# Altium PCB PCB2 (1).PcbDoc
Units mm, origin at the board's own origin, x right, y up, seen from the top; angles counter-clockwise.
Board outline 65.48 x 44.09 mm, 2 copper layers (Top Layer, Bottom Layer); 33 components, 23 nets, 94 pads, 6 vias.
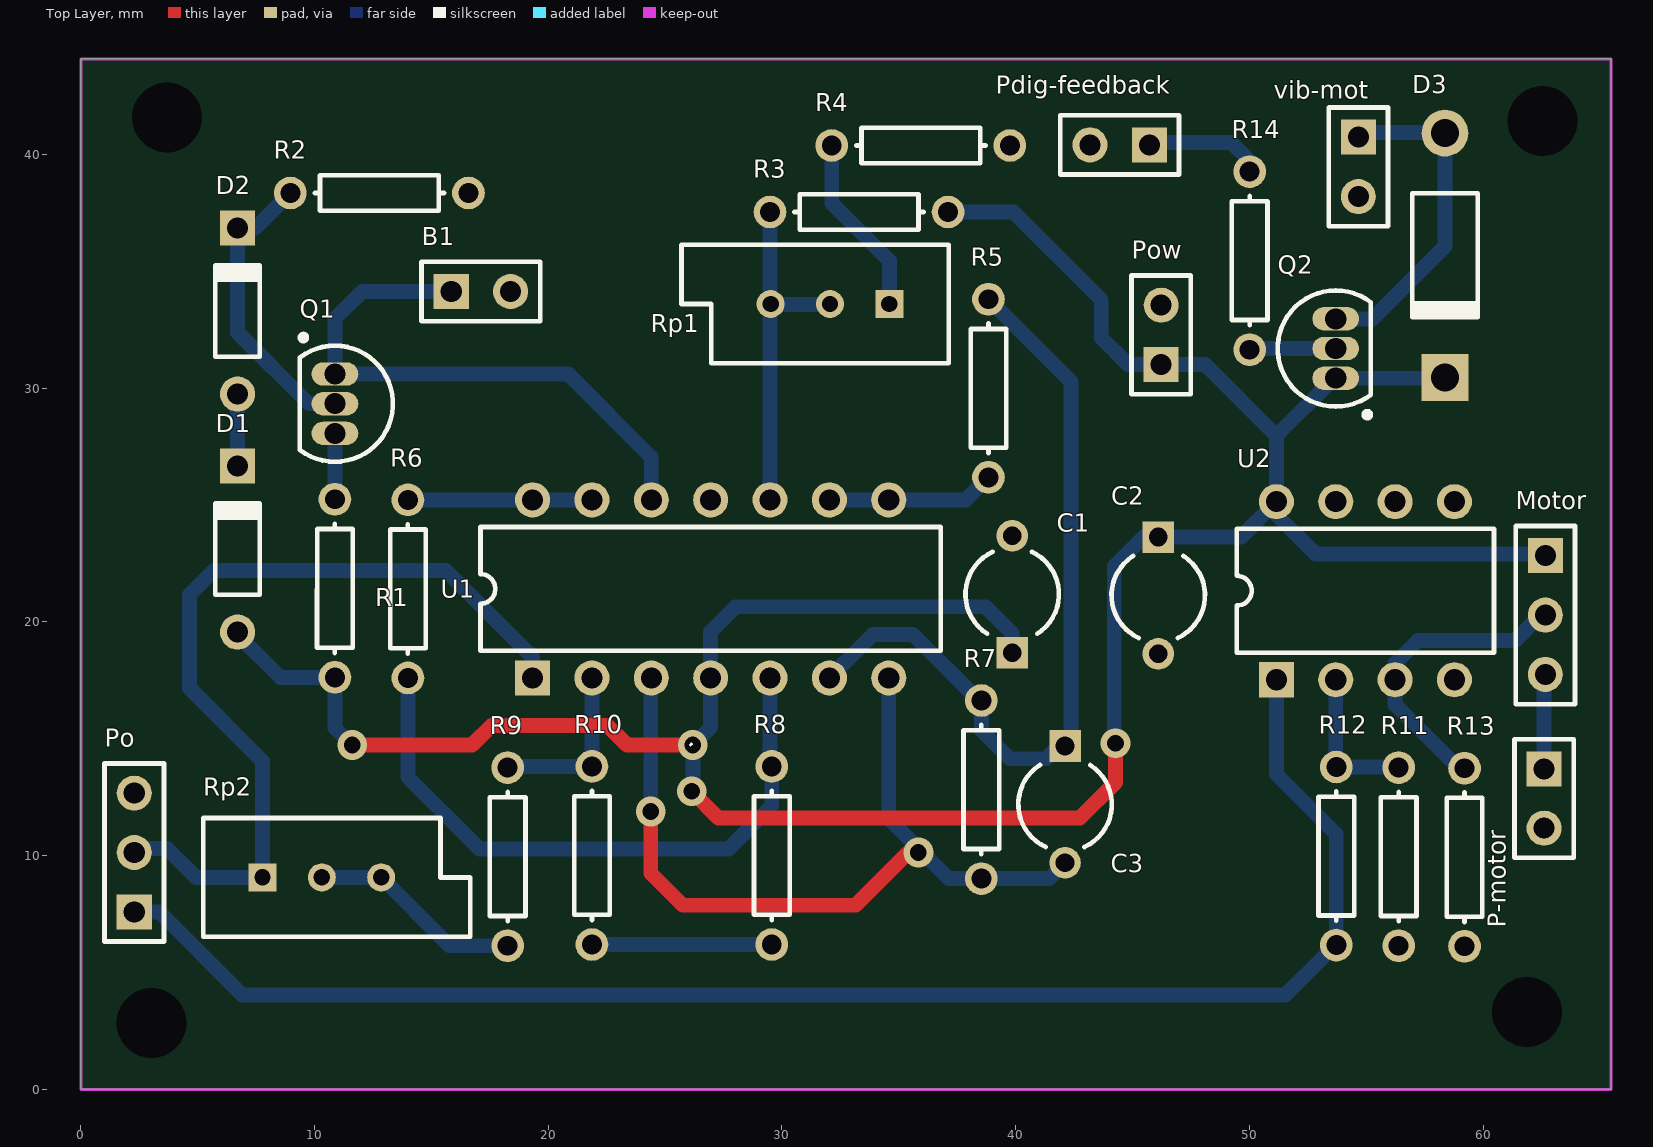
[diagram p0: Top Layer view]
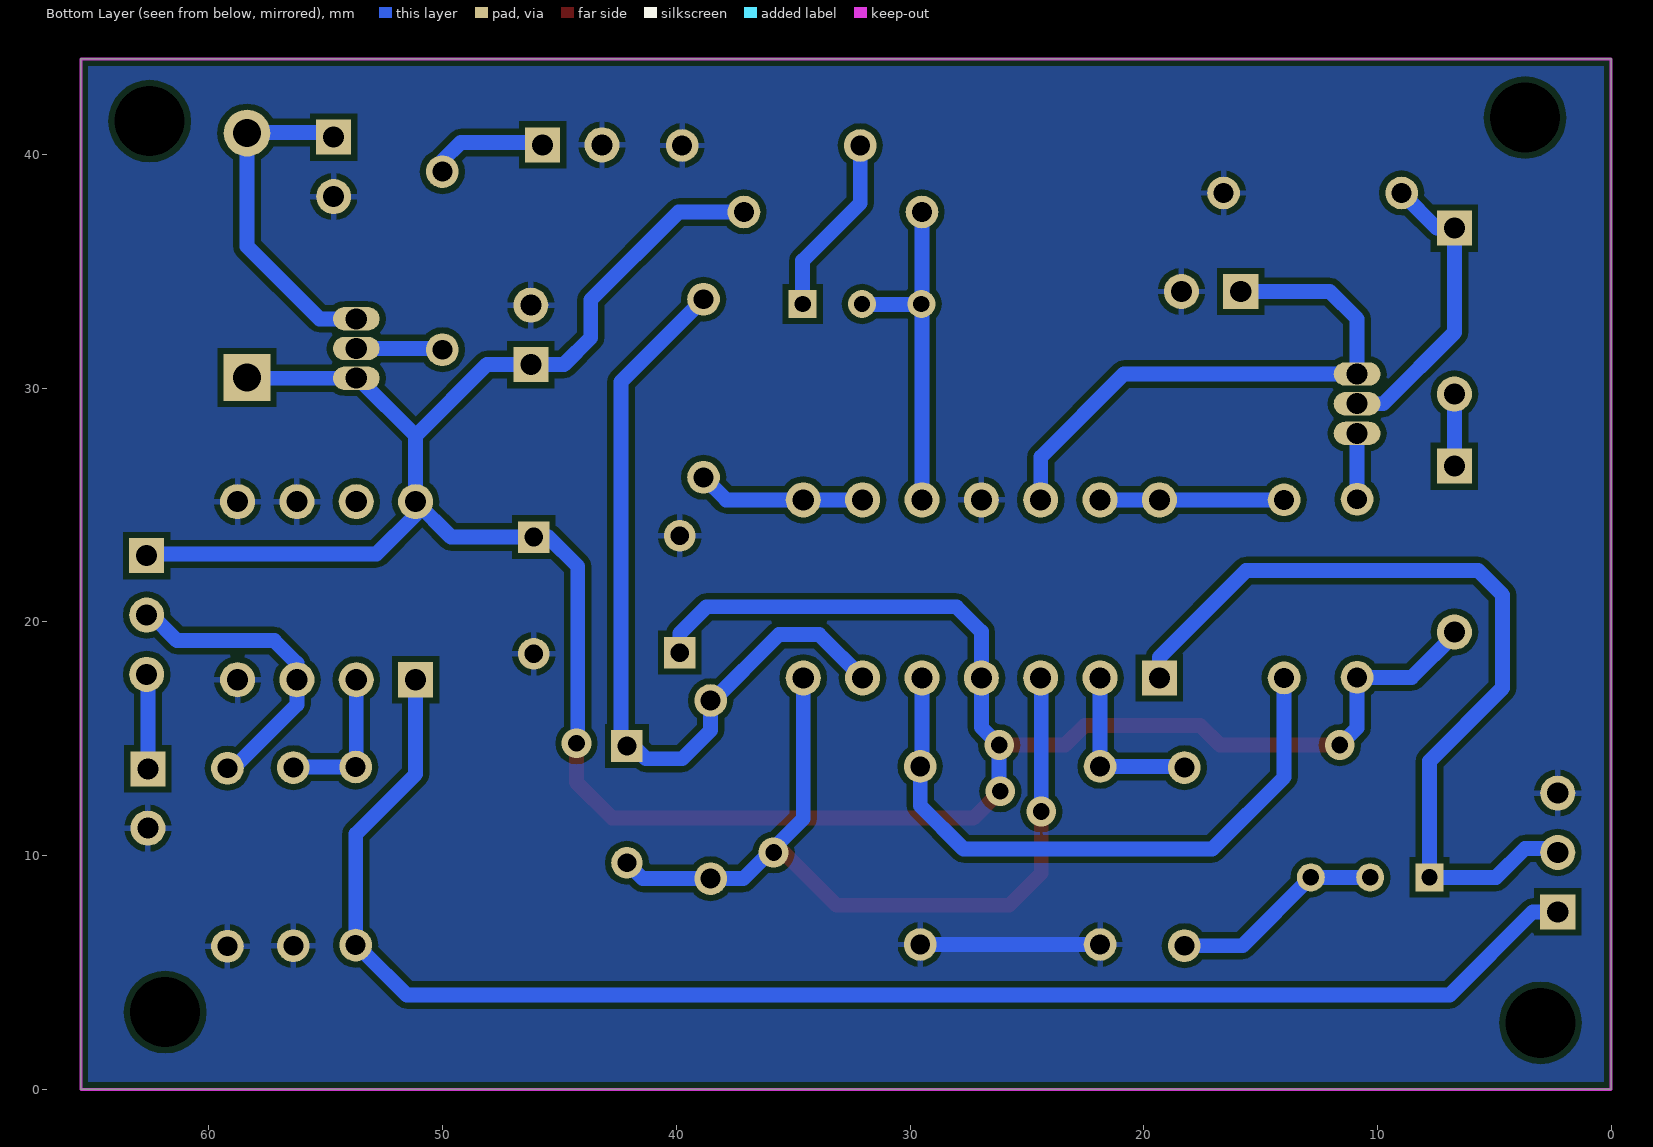
[diagram p1: Bottom Layer view, seen from below]

## Layer stack, top to bottom
Top Layer: signal copper 0.0356
Dielectric: dielectric 0.32, FR-4, Dk 4.8
Bottom Layer: signal copper 0.0356

## Board outline
0,0 65.481,0 65.481,44.094 0,44.094

## Design rules (kind name [scope] priority, off if disabled: settings)
Clearance [All] p1: gap=0.254
PolygonConnect [All] p1: connectstyle=Relief reliefconductorwidth=0.254 reliefentries=4 polygonreliefangle="90 Angle" airgapwidth=0.254
RoutingVias [All] p1: holewidth=0.711 width=1.27 viastyle="Through Hole" minholewidth=0.711 minwidth=1.27 maxholewidth=0.711 maxwidth=1.27
SolderMaskExpansion [All] p1: expansion=0.102
Width [All] p1: maxlimit=2.54 minlimit=0.254 preferedwidth=0.635
28 further rules are at their usual default settings.

## Components (designator, comment, footprint, x,y, rotation, side; value= is the part's Value field where it differs from the comment)
B1 "Header 2" HDR1X2 15.85,34.138 r0 top
C1 "7.9uF" CAPR5-4X5 39.853,21.184 r90 top
C2 "7.9uF" CAPR5-4X5 46.101,21.133 r270 top
C3 "7.9uF" CAPR5-4X5 42.113,12.192 r270 top
D1 "1N4148" DO-35 6.706,23.114 r90 top
D2 "1N4148" DO-35 6.706,33.299 r90 top
D3 "Diode 1N4001" DO-41 58.369,35.687 r270 top
Motor "Select input to RMS" HDR1X3 62.662,22.835 r270 top
P-motor "Header 2" HDR1X2 62.611,13.716 r270 top
Pdig-feedback "Header 2" HDR1X2 45.72,40.411 r180 top
Po "Header 3" HDR1X3 2.286,7.595 r90 top
Pow "Header 2" HDR1X2 46.228,31.013 r90 top
Q1 "BC557" TO-92A 10.871,29.337 r180 top
Q2 "BC548" TO-92A 53.696,31.699 r0 top
R1 "470R" AXIAL-0.3 10.871,21.438 r270 top
R2 "5k" AXIAL-0.3 12.776,38.354 r180 top
R3 "39k" AXIAL-0.3 33.299,37.541 r0 top
R4 "1k" AXIAL-0.3 35.941,40.386 r180 top
R5 "10k" AXIAL-0.3 38.837,29.997 r270 top
R6 "10k" AXIAL-0.3 13.995,21.412 r270 top
R7 "100k" AXIAL-0.3 38.532,12.827 r270 top
R8 "100k" AXIAL-0.3 29.566,10.008 r90 top
R9 "1k" AXIAL-0.3 18.263,9.957 r90 top
R10 "56k" AXIAL-0.3 21.869,10.008 r270 top
R11 "1k" AXIAL-0.3 56.388,9.957 r270 top
R12 "1k" AXIAL-0.3 53.721,9.982 r90 top
R13 "10R" AXIAL-0.3 59.207,9.931 r270 top
R14 "1k" AXIAL-0.3 50.013,35.458 r90 top
Rp1 "RPot" VR5 32.055,33.604 r180 top
Rp2 "RPot" VR5 10.312,9.068 r0 top
U1 "LM324AN" N014 26.949,21.412 r0 top
U2 "LM358AP" P008 54.966,21.336 r0 top
vib-mot "Header 2" HDR1X2 54.661,40.742 r270 top

## Footprints (in the part's own frame and the unit in brackets; to place one, negate y for a bottom-side part, rotate by r counter-clockwise, add the part's x,y. Pads: shape width x height; smd on the part's side, far side on the other; paste and mask are expansions set on the pad)
AXIAL-0.3 [mm] "Axial Device, Thru-Hole; 2 Leads; 0.3 in Pin Spacing"
  round 1.4 hole 0.85: 1(-3.81,0) 2(3.81,0)
  silkscreen extent -2.77,-0.76 2.77,0.76
CAPR5-4X5 [mm] "Capacitor; 2 Leads"
  rect 1.35x1.35 hole 0.8: 1(-2.5,0)
  round 1.35 hole 0.8: 2(2.5,0)
  silkscreen extent -1.69,-2 1.82,2
DO-35 [mm] "Diode, Axial; Body 3.8 x 1.9 mm (LxDia. max), Lead Dia. 0.53 mm (max)"
  round 1.5 hole 0.9: 1(-3.55,0)
  rect 1.5x1.5 hole 0.9: 2(3.55,0)
  silkscreen extent -1.95,-0.95 2.05,0.95
DO-41 [mm] "Diode, Axial; Body 5.2 x 2.7 mm (LxDia. max), Lead Dia. 0.86 mm (max)"
  round 2 hole 1.2: 1(-5.23,0)
  rect 2x2 hole 1.2: 2(5.23,0)
  silkscreen extent -2.65,-1.4 2.75,1.4
HDR1X2 [mm] "Connector; Header; 2 Position"
  rect 1.5x1.5 hole 0.9: 1(0,0)
  round 1.5 hole 0.9: 2(2.54,0)
  silkscreen extent -1.27,-1.27 3.81,1.27
HDR1X3 [mm] "Connector; Header; 3 Position"
  rect 1.5x1.5 hole 0.9: 1(0,0)
  round 1.5 hole 0.9: 2(2.54,0) 3(5.08,0)
  silkscreen extent -1.27,-1.27 6.35,1.27
N014 [mm] "DIP; 14 Leads; Row Spacing 7.62 mm; Pitch 2.54 mm"
  rect 1.5x1.5 hole 0.9: 1(-7.62,-3.81)
  round 1.5 hole 0.9: 2(-5.08,-3.81) 3(-2.54,-3.81) 4(0,-3.81) 5(2.54,-3.81) 6(5.08,-3.81) 7(7.62,-3.81) 8(7.62,3.81) 9(5.08,3.81) 10(2.54,3.81) 11(0,3.81) 12(-2.54,3.81) 13(-5.08,3.81) 14(-7.62,3.81)
  silkscreen extent -9.85,-2.65 9.85,2.65
P008 [mm] "DIP; 8 Leads; Row Spacing 7.62 mm; Pitch 2.54 mm"
  rect 1.5x1.5 hole 0.9: 1(-3.81,-3.81)
  round 1.5 hole 0.9: 2(-1.27,-3.81) 3(1.27,-3.81) 4(3.81,-3.81) 5(3.81,3.81) 6(1.27,3.81) 7(-1.27,3.81) 8(-3.81,3.81)
  silkscreen extent -5.5,-2.65 5.5,2.65
TO-92A [mm] "TO, Flat Index; 3 In-Line, Axial Leads; Body Dia. 4.5mm; Leads 0.51 x 0.48 mm (max)"
  oval 2x1 hole 0.9: 1(0,-1.27) 2(0,0) 3(0,1.27)
  silkscreen extent -2.48,-2.95 1.5,2.48, body extent -2.5,-2.5 1.5,2.5, height 6.86
VR5 [mm] "Thru-Hole; 3 Leads"
  rect 1.2x1.2 hole 0.7: 1(-2.54,0)
  round 1.2 hole 0.7: 2(0,0) 3(2.54,0)
  silkscreen extent -5.08,-2.54 6.35,2.54

## Part data
B1 P-motor Pdig-feedback Pow vib-mot: "Header, 2-Pin"
C1 C2 C3: library part Cap2, "Capacitor"
D1 D2: library part "Diode 1N4148", "High Conductance Fast Diode"
D3: "1 Amp General Purpose Rectifier"
Motor: library part "Header 3", "Header, 3-Pin"
Po: "Header, 3-Pin"
Q1: library part 2N3906, "PNP General Purpose Amplifier"
Q2: library part 2N3904, "NPN General Purpose Amplifier"
R1 R2 R3 R4 R5 R6 R7 R8 R9 R10 R11 R12 R13 R14: library part Res1, "Resistor"
Rp1 Rp2: "Potentiometer"
U1: "Quadruple Operational Amplifier"
U2: "Dual Operational Amplifier"

## Free pads (board coordinates)
  round 0.4 hole 3 mask+0: 0(61.874,3.302) 1(3.023,2.845) 2(3.683,41.58) 3(62.535,41.427)

## Via types
v1: diameter 1.27, hole 0.711, Top Layer to Bottom Layer, 6 vias

## Nets (pads, with @x,y where several pads share a name; then routed paths per layer and width w, separated by ;. In a path a pad name is that pad's centre, name@x,y a point inside that pad or via, vN(x,y) a via of type N, cw(c..) or ccw(c..) an arc to the next point about the centre after c; other vN are vias at no path point)
GND: B1.2 C1.2 C2.2 P-motor.2 Pdig-feedback.2 Po.3 Pow.2 R2.1 R4.1 R8.1 R10.2 R11.2 R13.2 U1.11 U2.4 U2.5 U2.6 vib-mot.2 | length 7.7
  Bottom Layer w0.635: R10.2 R8.1
NetB1_1: B1.1 Q1.1 U1.12 | length 24.7
  Bottom Layer w0.635: B1.1 12.04,34.138 10.871,32.969 Q1.1 20.853,30.607 24.409,27.051 U1.12
NetC3_1: C3.1 R5.1 R7.1 U1.6 | length 34.6
  Bottom Layer w0.635: U1.6 33.884,19.456 35.611,19.456 R7.1@38.557,16.51 ; R7.1 38.532,15.367 39.751,14.148 41.3,14.148 42.367,15.215 42.367,30.277 R5.1
NetC3_2: C3.2 R7.2 U1.3 U1.7 | length 36.2
  Top Layer w0.635: v1(24.384,11.887) 24.384,9.246 25.756,7.874 33.147,7.874 35.408,10.135 v1(35.839,10.135)
  Bottom Layer w0.635: v1(24.384,11.887) 24.384,17.577 U1.3 ; U1.7 34.569,11.582 37.135,9.017 R7.2 41.438,9.017 C3.2
NetD1_2: D1.2 D2.1 | length 3.1
  Bottom Layer w0.635: D1.2 D2.1
NetD2_2: D2.2 Q1.2 R2.2 | length 12.8
  Bottom Layer w0.635: R2.2 7.462,36.849 D2.2 6.706,32.385 9.754,29.337 Q1.2
NetD3_1: D3.1 Q2.3 vib-mot.1 | length 14.5
  Bottom Layer w0.635: Q2.3 55.27,32.969 58.369,36.068 58.369,40.945 vib-mot.1@54.661,40.945
NetMotor_2: Motor.2 R13.1 U2.3 | length 12.9
  Bottom Layer w0.635: R13.1 58.953,13.741 56.236,16.459 U2.3 56.236,18.237 57.201,19.202 61.366,19.202 Motor.2@62.408,20.244
NetMotor_3: Motor.3 P-motor.1 | length 4
  Bottom Layer w0.635: P-motor.1 Motor.3@62.611,17.704
NetPdig-feedback_1: Pdig-feedback.1 R14.2 | length 5.1
  Bottom Layer w0.635: Pdig-feedback.1 45.822,40.513 49.225,40.513 50.013,39.726 R14.2
NetPo_1: Po.1 R12.1 U2.1 | length 65.9
  Bottom Layer w0.635: Po.1 3.353,7.595 6.909,4.039 51.537,4.039 R12.1@53.327,5.829 ; U2.1@51.029,17.399 U2.1 51.156,13.487 53.721,10.922 R12.1
NetPo_2: Po.2 Rp2.1 U1.1 | length 36.8
  Bottom Layer w0.635: Po.2@2.438,10.312 3.683,10.312 4.928,9.068 Rp2.1 7.772,14.046 4.648,17.17 4.648,21.158 5.69,22.2 15.621,22.2 19.329,18.491 U1.1
NetQ1_1: Q1.3 R1.1 | length 2.8
  Bottom Layer w0.635: R1.1 Q1.3
NetQ2_2: Q2.2 R14.1 | length 3.6
  Bottom Layer w0.635: R14.1@50.063,31.699 Q2.2
NetR3_1: R3.1 Rp1.2 Rp1.3 U1.10 | length 14.8
  Bottom Layer w0.635: U1.10 29.489,33.579 Rp1.2@32.029,33.579 ; Rp1.3@29.489,33.63 R3.1
NetR4_2: R4.2 Rp1.1 | length 7.8
  Bottom Layer w0.635: R4.2 32.131,37.922 34.595,35.458 Rp1.1
NetR5_2: R5.2 U1.8 U1.9 | length 7.2
  Bottom Layer w0.635: U1.9 U1.8 37.871,25.222 R5.2
NetR6_1: R6.1 U1.13 U1.14 | length 7.9
  Bottom Layer w0.635: R6.1 U1.14 U1.13
NetR6_2: R6.2 R8.2 U1.5 | length 27.2
  Bottom Layer w0.635: R6.2 13.995,13.36 17.069,10.287 27.711,10.287 29.566,12.141 R8.2 ; R8.2@29.489,13.894 U1.5
NetR9_1: R9.1 Rp2.2 Rp2.3 | length 9.2
  Bottom Layer w0.635: Rp2.2 Rp2.3 15.773,6.147 R9.1
NetR9_2: R9.2 R10.1 U1.2 | length 7.3
  Bottom Layer w0.635: R9.2@18.313,13.818 R10.1 U1.2
NetR11_1: R11.1 R12.2 U2.2 | length 6.4
  Bottom Layer w0.635: U2.2 53.696,13.818 R12.2 R11.1@56.363,13.792
VCC: C1.1 C2.1 D1.1 D3.2 Motor.1 Pow.1 Q2.1 R1.2 R3.2 U1.4 U2.8 | length 124.7
  Top Layer w0.635: v1(11.608,14.732) 16.739,14.732 17.577,15.57 22.53,15.57 23.368,14.732 v1(26.187,14.732) ; v1(26.137,12.751) 27.28,11.608 42.748,11.608 44.272,13.132 v1(44.272,14.808)
  Bottom Layer w0.635: D1.1 6.706,19.456 8.534,17.628 R1.2 10.871,15.469 v1(11.608,14.732) ; v1(26.137,12.751) 26.137,12.903 26.187,12.954 v1(26.187,14.732) 26.949,15.494 U1.4 26.949,19.583 28.016,20.65 38.71,20.65 39.853,19.507 C1.1 ; R3.2 39.903,37.541 43.663,33.782 43.663,32.156 44.806,31.013 Pow.1 48.108,31.013 51.156,27.965 ; v1(44.272,14.808) 44.221,14.859 44.221,22.377 45.477,23.633 C2.1 49.642,23.633 U2.8 ; D3.2@58.341,30.429 Q2.1 53.619,30.429 51.156,27.965 ; Motor.1@62.662,22.911 52.832,22.911 51.156,24.587 U2.8 ; U2.8 51.156,27.965
pads on no net: U2.7

## Polygon pours and split planes (outlines as drawn)
GND on Bottom Layer "GND" (solid, remove dead copper, pour order 2): -1.575,47.219 -0.254,48.539 74.447,48.539 74.447,-1.194 72.339,-3.302 70.231,-1.194 -1.067,-1.194

## Keep-outs
Keep-Out Layer:
  the board outline again, w0.127

## Silkscreen, mask and mechanical layers (free items; w line width, h text height)
Top Overlay:
  lines w0.127: 26.086,14.732 26.137,14.783